# Altium PCB BaseNode.PcbDoc
Units mil, origin at the board's own origin, x right, y up, seen from the top; angles counter-clockwise.
Board outline 2200 x 2900 mil, 2 copper layers (Top Layer, Bottom Layer), stack 65.8 mil thick; 88 components, 76 nets, 334 pads, 80 vias.
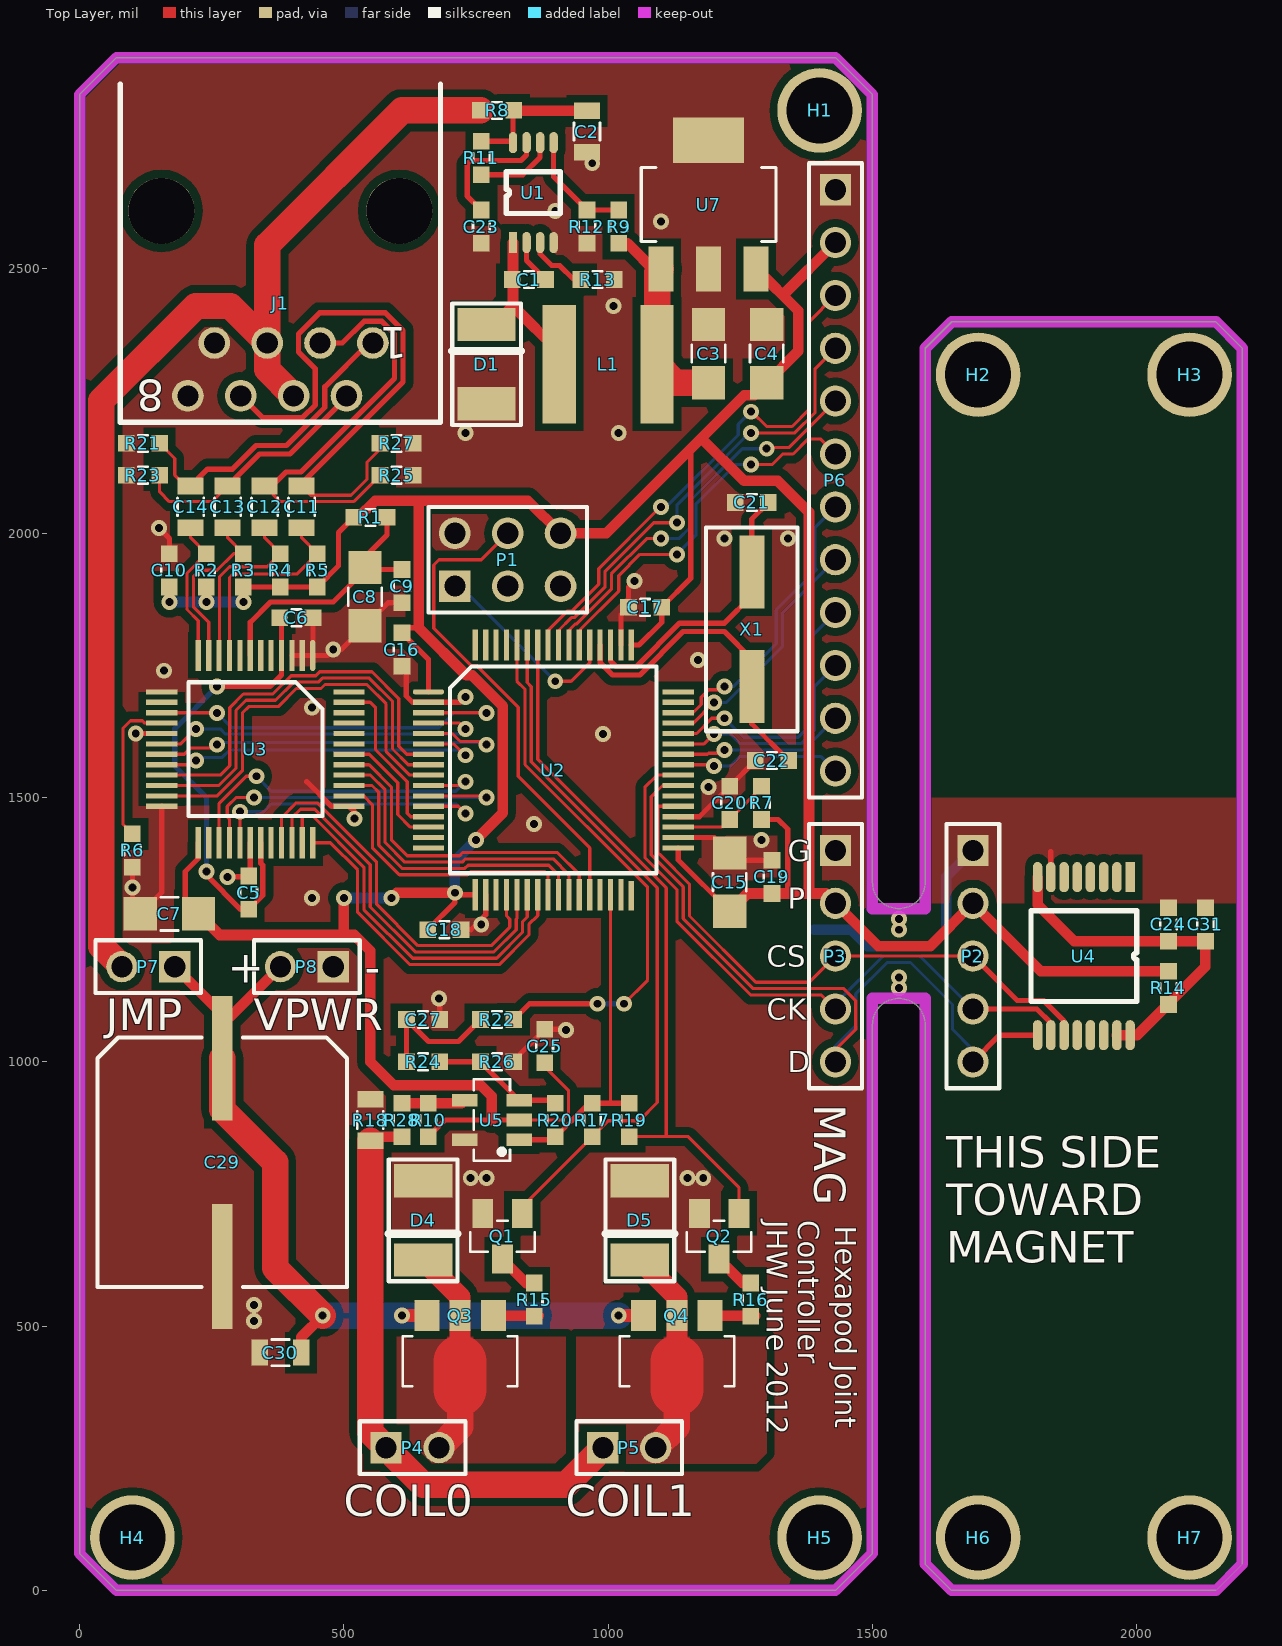
[diagram p0: Top Layer view]
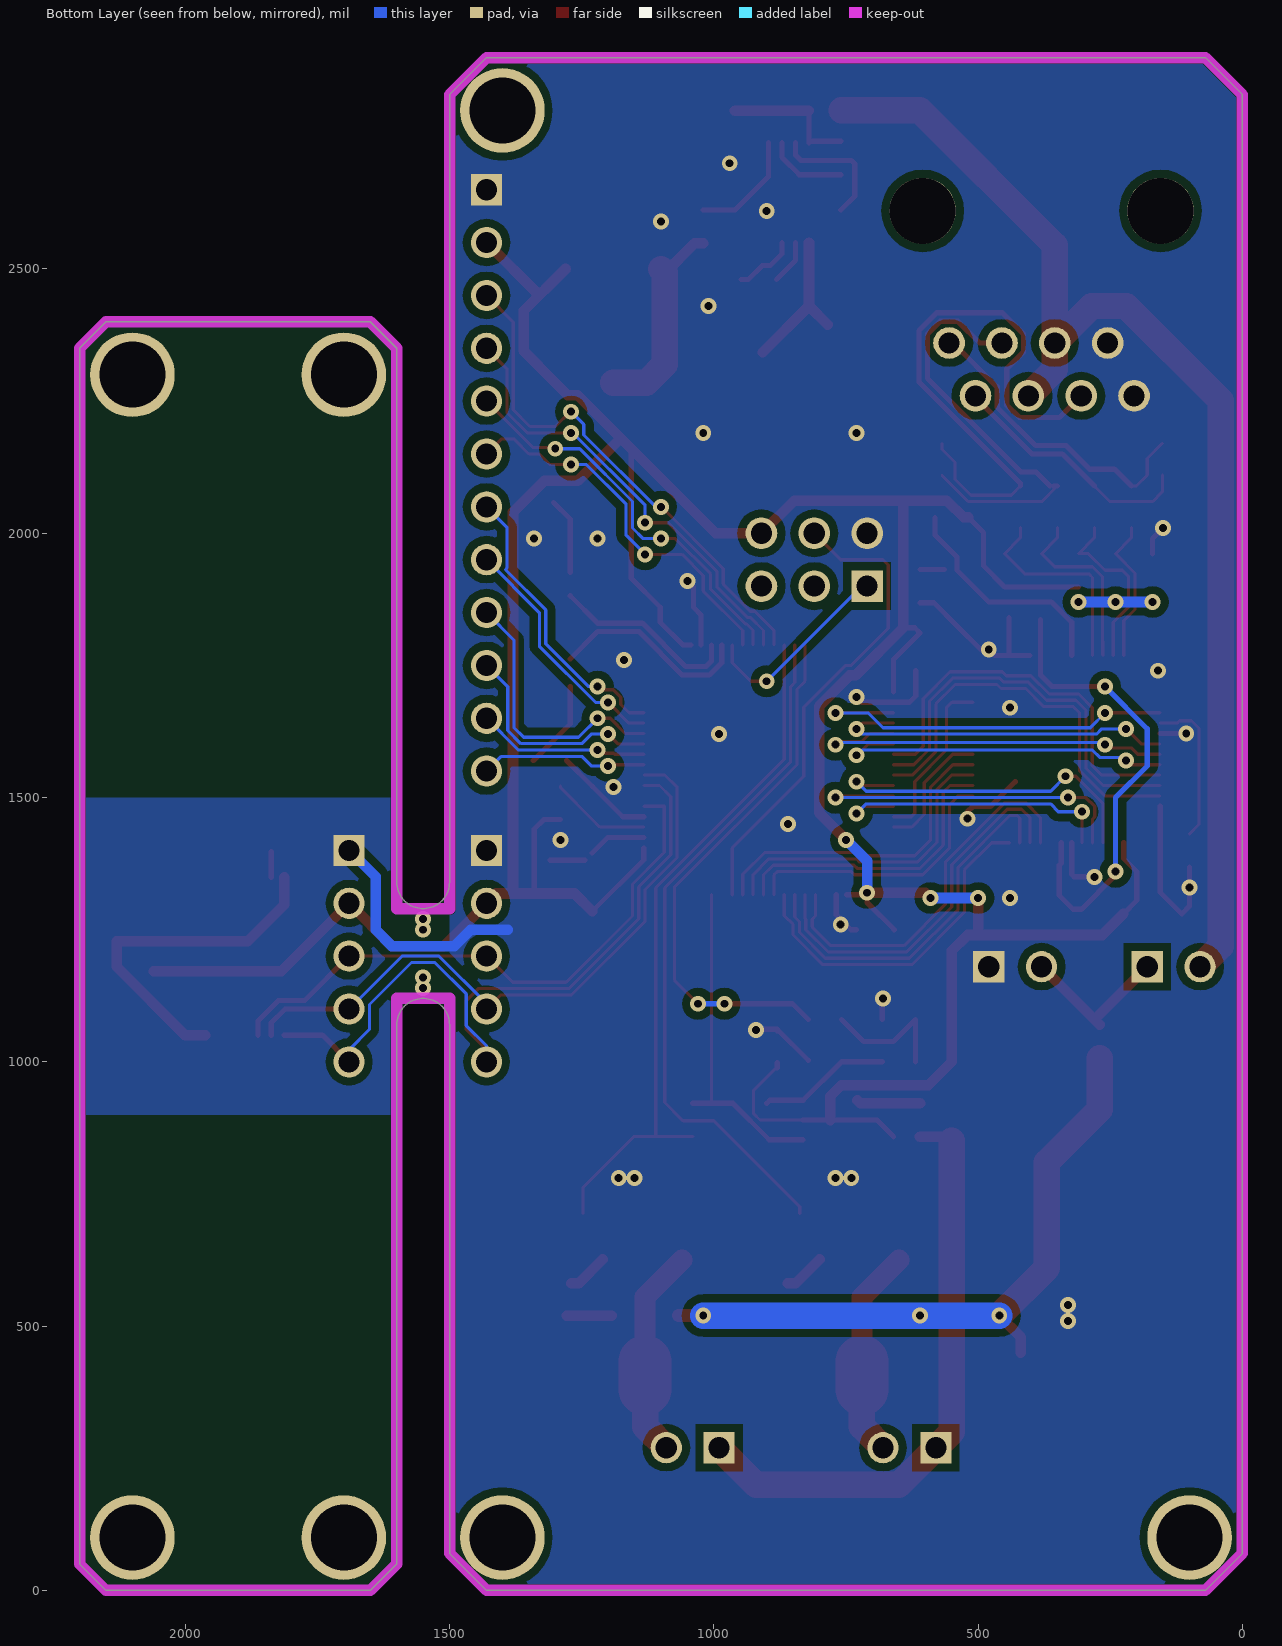
[diagram p1: Bottom Layer view, seen from below]

## Layer stack, top to bottom
Top Layer: signal copper 1.4
Dielectric: core 63, FR-4, Dk 4.8
Bottom Layer: signal copper 1.4

## Board outline
70,0 0,70 0,2830 70,2900 1430,2900 1500,2830 1500,1340 ccw(c1550,1340) 1600,1340 1600,2350 1650,2400 2150,2400 2200,2350 2200,50 2150,0 1650,0 1600,50 1600,1070 ccw(c1550,1070) 1500,1070 1500,70 1430,0

## Design rules (kind name [scope] priority, off if disabled: settings)
Clearance KEEPOUT [OnLayer('Keep-Out Layer')] p1: gap=1
Clearance POLY-STUFF [inpoly] p2: gap=15
Clearance [All] p3: gap=6
ComponentClearance [All] p1: gap=1 collisioncheckmode=3 verticalgap=1 showdistances=FALSE
HoleSize [All] p1: absolutevalues=TRUE maxlimit=500 minlimit=10 maxpercent=80.000 minpercent=20.000
MinimumSolderMaskSliver [All] p1: minsoldermaskwidth=3
PlaneConnect [All] p1: planeconnectstyle=Direct reliefexpansion=20 reliefentries=4 reliefconductorwidth=20 reliefairgap=10
PolygonConnect [All] p1: connectstyle=Direct reliefconductorwidth=20 reliefentries=4 polygonreliefangle="90 Angle"
RoutingVias [All] p1: holewidth=13 width=27 viastyle="Through Hole" minholewidth=10 minwidth=10 maxholewidth=500 maxwidth=500
SilkscreenOverComponentPads [All] p1: minsilkscreentomaskgap=3
SolderMaskExpansion [All] p1: expansion=2
Width [All] p1: maxlimit=100 minlimit=6 preferedwidth=10
23 further rules are at their usual default settings.

## Components (designator, comment, footprint, x,y, rotation, side; value= is the part's Value field where it differs from the comment)
C1 "0.1uF 25V" 0603 850,2480 r180 top
C2 "1uF 100V" 0805 960,2760 r90 top
C3 "22uF 6.3V" 1206 1190,2340 r270 top
C4 "22uF 6.3V" 1206 1300,2340 r270 top
C5 "2.2uF 10V" 0603 320,1320 r270 top
C6 "2.2uF 10V" 0603 410,1840 r180 top
C7 "22uF 6.3V" 1206 170,1280 r0 top
C8 "22uF 6.3V" 1206 540,1880 r90 top
C9 "0.1uF 25V" 0603 610,1900 r90 top
C10 "0.1uF 25V" 0603 170,1930 r270 top
C11 "33nF 250V" 0805 420,2050 r270 top
C12 "33nF 250V" 0805 350,2050 r270 top
C13 "33nF 250V" 0805 280,2050 r270 top
C14 "33nF 250V" 0805 210,2050 r270 top
C15 "22uF 6.3V" 1206 1230,1340 r270 top
C16 "0.1uF 25V" 0603 610,1780 r90 top
C17 "0.1uF 25V" 0603 1070,1860 r0 top
C18 "0.1uF 25V" 0603 690,1250 r180 top
C19 "0.1uF 25V" 0603 1310,1350 r270 top
C20 "2.2uF 10V" 0603 1230,1490 r270 top
C21 "20pF" 0603 1271.73,2058.27 r0 top
C22 "20pF" 0603 1310,1570 r0 top
C23 "0.1uF 25V" 0603 760,2580 r90 top
C24 "2.2uF 10V" 0603 2060,1260 r270 top
C25 "0.1uF 25V" 0603 880,1030 r270 top
C27 "2.2uF 10V" 0603 650,1080 r180 top
C29 "100uF 80V" "Capacitor 12mm DIA POLAR" 270,810 r90 top
C30 "1uF 100V" 0805 380,450 r0 top
C31 "2.2uF 10V" 0603 2130,1260 r270 top
D1 "CDBA140-G" SMA-DIODE 770,2320 r90 top
D4 "CDBA140-G" SMA-DIODE 650,700 r270 top
D5 "CDBA140-G" SMA-DIODE 1060,700 r270 top
H1 "MOUNT HOLE" MOUNT_HOLE 1400,2800 r0 top
H2 "MOUNT HOLE" MOUNT_HOLE 1700,2300 r0 top
H3 "MOUNT HOLE" MOUNT_HOLE 2100,2300 r0 top
H4 "MOUNT HOLE" MOUNT_HOLE 100,100 r0 top
H5 "MOUNT HOLE" MOUNT_HOLE 1400,100 r0 top
H6 "MOUNT HOLE" MOUNT_HOLE 1700,100 r0 top
H7 "MOUNT HOLE" MOUNT_HOLE 2100,100 r0 top
J1 "SS-6488-NF" SS-6488-NF 380,2610 r180 top
L1 "Inductor" "NR6028 Inductor" 1000,2320 r0 top
P1 "Header 3X2" HDR2X3 710,1900 r0 top
P2 "Header 5" HDR1X5 1690,1400 r270 top
P3 "Header 5" HDR1X5 1430,1400 r270 top
P4 "Header 2" HDR1X2 580,270 r0 top
P5 "Header 2" HDR1X2 990,270 r0 top
P6 "Header 12" HDR1X12 1430,2650 r270 top
P7 "Header 2" HDR1X2 180,1180 r180 top
P8 "Header 2" HDR1X2 480,1180 r180 top
Q1 "NFET" SOT-23 800,670 r180 top
Q2 "NFET" SOT-23 1210,670 r180 top
Q3 "#NAME?" "SOT-89 - PBSS305PX" 720,520 r180 top
Q4 "#NAME?" "SOT-89 - PBSS305PX" 1130,520 r180 top
R1 "LM4041EIM3X-1.2_1" 0603 550,2030 r0 top
R2 "51" 0603 240,1930 r270 top
R3 "51" 0603 310,1930 r270 top
R4 "51" 0603 380,1930 r270 top
R5 "51" 0603 450,1930 r270 top
R6 "6.49K" 0603 100,1400 r90 top
R7 "LM4041EIM3X-1.2_1" 0603 1290,1490 r90 top
R8 "LM4041EIM3X-1.2_1" 0603 790,2800 r0 top
R9 "3.16k" 0603 1020,2580 r270 top
R10 "1meg" 0603 660,890 r270 top
R11 "100k" 0603 760,2710 r90 top
R12 "6.49K" 0603 960,2580 r90 top
R13 "DNP" 0603 980,2480 r180 top
R14 "LM4041EIM3X-1.2_1" 0603 2060,1140 r270 top
R15 "1k" 0603 860,550 r270 top
R16 "1k" 0603 1270,550 r270 top
R17 "10k" 0603 970,890 r90 top
R18 "220m" 0805 550,890 r270 top
R19 "10k" 0603 1040,890 r90 top
R20 "1meg" 0603 900,890 r90 top
R21 "100k" 0603 120,2170 r0 top
R22 "1k" 0603 790,1080 r0 top
R23 "100k" 0603 120,2110 r0 top
R24 "100k" 0603 650,1000 r180 top
R25 "100k" 0603 600,2110 r180 top
R26 "10k" 0603 790,1000 r180 top
R27 "100k" 0603 600,2170 r180 top
R28 "3.16k" 0603 610,890 r270 top
U1 "LM5007MM/NOPB" MSOP-8 820,2550 r90 top
U2 "MCF51CN128CLH" "LQFP-64 10x10mm .5mm pitch" 660,1700 r0 top locked
U3 "KSZ8051MLL" "LQFP-48 7x7mm 0.5mm pitch" 441.1,1768.9 r270 top
U4 "AS5045-ASSU" SSOP-16 1900,1200 r270 top
U5 "MIC7221YM5 TR" SOT-23-5 780,890 r180 top
U7 "TC1262-3.3VDBTR" SOT-223 1100,2500 r0 top
X1 "ECS-250-20-3X-EN-TR" CSM-3X 1271.73,1818.27 r90 top

## Footprints (in the part's own frame and the unit in brackets; to place one, negate y for a bottom-side part, rotate by r counter-clockwise, add the part's x,y. Pads: shape width x height; smd on the part's side, far side on the other; paste and mask are expansions set on the pad)
0603 [mm]
  rect 0.8x0.8 smd: 1(-0.8,0) 2(0.8,0)
  silkscreen extent -0.23,-0.4 0.23,0.4, body extent -0.8,-0.4 0.8,0.4, height 0.45
0805 [mm]
  rect 0.8x1.25 smd: 1(-1,0) 2(1,0)
  silkscreen extent -0.43,-0.63 0.43,0.63, body extent -1,-0.63 1,0.63, height 1.25
1206 [mm]
  rect 1.6x1.6 smd: 1(-1.4,0) 2(1.4,0)
  silkscreen extent -0.43,-0.8 0.43,0.8, body extent -1.6,-0.8 1.6,0.8, height 1.6
"Capacitor 12mm DIA POLAR" [mm]
  rect 6x1 smd: 1(-5,0) 2(5,0)
  silkscreen extent -6,-6 6,6, body extent -6,-6 6,6, height 11
CSM-3X [mm]
  rect 3.5x1.2 smd: 1(-2.75,0) 2(2.75,0)
  silkscreen extent -4.9,-2.2 4.9,2.2
HDR1X2 [mm] "Connector; Header; 2 Position"
  rect 1.5x1.5 hole 1.016: 1(0,0)
  round 1.5 hole 1.016: 2(2.54,0)
  silkscreen extent -1.27,-1.27 3.81,1.27
HDR1X5 [mm] "Connector; Header; 5 Position"
  rect 1.5x1.5 hole 1.016: 1(0,0)
  round 1.5 hole 1.016: 2(2.54,0) 3(5.08,0) 4(7.62,0) 5(10.16,0)
  silkscreen extent -1.27,-1.27 11.43,1.27
HDR1X12 [mm] "Connector; Header; 12 Position"
  rect 1.5x1.5 hole 1.016: 1(0,0)
  round 1.5 hole 1.016: 2(2.54,0) 3(5.08,0) 4(7.62,0) 5(10.16,0) 6(12.7,0) 7(15.24,0) 8(17.78,0) 9(20.32,0) 10(22.86,0) 11(25.4,0) 12(27.94,0)
  silkscreen extent -1.27,-1.27 29.21,1.27
HDR2X3 [mil] "Connector; Header; 3x2 Position"
  rect 60x60 hole 40: 1(0,0)
  round 60 hole 40: 2(0,100) 3(100,0) 4(100,100) 5(200,0) 6(200,100)
  silkscreen extent -50,-50 250,150
"LQFP-48 7x7mm 0.5mm pitch" [mm]
  oval 1.5x0.25 smd: 1(0,0)
  rect 1.5x0.25 smd: 2(0,-0.5) 3(0,-1) 4(0,-1.5) 5(0,-2) 6(0,-2.5) 7(0,-3) 8(0,-3.5) 9(0,-4) 10(0,-4.5) 11(0,-5) 12(0,-5.5) 25(9,-5.5) 26(9,-5) 27(9,-4.5) 28(9,-4) 29(9,-3.5) 30(9,-3) 31(9,-2.5) 32(9,-2) 33(9,-1.5) 34(9,-1) 35(9,-0.5) 36(9,0)
  rect 0.25x1.5 smd: 13(1.75,-7.25) 14(2.25,-7.25) 15(2.75,-7.25) 16(3.25,-7.25) 17(3.75,-7.25) 18(4.25,-7.25) 19(4.75,-7.25) 20(5.25,-7.25) 21(5.75,-7.25) 22(6.25,-7.25) 23(6.75,-7.25) 24(7.25,-7.25) 37(7.25,1.75) 38(6.75,1.75) 39(6.25,1.75) 40(5.75,1.75) 41(5.25,1.75) 42(4.75,1.75) 43(4.25,1.75) 44(3.75,1.75) 45(3.25,1.75) 46(2.75,1.75) 47(2.25,1.75) 48(1.75,1.75)
  silkscreen extent 1.28,-5.96 7.71,0.47
"LQFP-64 10x10mm .5mm pitch" [mm]
  oval 1.5x0.25 smd: 1(0,0)
  rect 1.5x0.25 smd: 2(0,-0.5) 3(0,-1) 4(0,-1.5) 5(0,-2) 6(0,-2.5) 7(0,-3) 8(0,-3.5) 9(0,-4) 10(0,-4.5) 11(0,-5) 12(0,-5.5) 13(0,-6) 14(0,-6.5) 15(0,-7) 16(0,-7.5) 33(12,-7.5) 34(12,-7) 35(12,-6.5) 36(12,-6) 37(12,-5.5) 38(12,-5) 39(12,-4.5) 40(12,-4) 41(12,-3.5) 42(12,-3) 43(12,-2.5) 44(12,-2) 45(12,-1.5) 46(12,-1) 47(12,-0.5) 48(12,0)
  rect 0.25x1.5 smd: 17(2.25,-9.75) 18(2.75,-9.75) 19(3.25,-9.75) 20(3.75,-9.75) 21(4.25,-9.75) 22(4.75,-9.75) 23(5.25,-9.75) 24(5.75,-9.75) 25(6.25,-9.75) 26(6.75,-9.75) 27(7.25,-9.75) 28(7.75,-9.75) 29(8.25,-9.75) 30(8.75,-9.75) 31(9.25,-9.75) 49(9.75,2.25) 50(9.25,2.25) 51(8.75,2.25) 52(8.25,2.25) 53(7.75,2.25) 54(7.25,2.25) 55(6.75,2.25) 56(6.25,2.25) 57(5.75,2.25) 58(5.25,2.25) 59(4.75,2.25) 60(4.25,2.25) 61(3.75,2.25) 62(3.25,2.25) 63(2.75,2.25) 64(2.25,2.25)
  rect 0.25x1.4 smd: 32(9.75,-9.8)
  silkscreen extent 1.03,-8.71 10.96,1.22
MOUNT_HOLE [mil]
  round 160 hole 125: 0(0,0)
MSOP-8 [mil]
  rect 40x16 smd: 1(0,0)
  oval 40x16 smd: 2(0,-25.6) 3(0,-51.2) 4(0,-76.8) 5(189,-76.8) 6(189,-51.2) 7(189,-25.6) 8(189,0)
  silkscreen extent 55,-90 134,13
"NR6028 Inductor" [mm]
  rect 1.6x5.7 smd: 1(-2.35,0) 2(2.35,0)
SMA-DIODE [mm]
  rect 1.6x2.8 smd: A(-1.9,0) K(1.9,0)
  silkscreen extent -2.92,-1.65 2.92,1.65
SOT-23 [mm] "SOT-23"
  rect 1x1.4 smd: 1(-0.95,-1.1) 2(0.95,-1.1) 3(0,1.1)
  silkscreen extent -1.55,-0.75 1.55,0.75, body extent -1.55,-1.35 1.55,1.35, height 1.3
SOT-23-5 [mm] "SOT23, 5-Leads, Body 3.1x3.0mm (max), Pitch 0.95mm, IPC High Density"
  rect 1.22x0.62 smd: 1(-1.31,0.95) 2(-1.31,0) 3(-1.31,-0.95) 4(1.31,-0.95) 5(1.31,0.95)
  silkscreen extent -0.87,-1.95 0.87,1.95, body extent -1.4,-1.95 1.4,1.95, height 1
"SOT-89 - PBSS305PX" [mm] "SOT-89"
  rect 1.2x1.5 smd: 1(1.6,0) 3(-1.6,0)
  rect 1x1.5 smd: 2(0,0)
  Top Layer lines w1: 0,1.778 0,0
  Top Layer lines w2.54: 0,3.556 0,2.2
  silkscreen extent -2.75,1 2.75,3.4, body extent -2.75,0 2.75,4.4, height 1.3
SOT-223 [mil] "SOT-223"
  rect 135x86 smd: 0(90,244)
  rect 47x86 smd: 1(0,0) 2(90,0) 3(180,0)
  silkscreen extent -38,52 218,192, body extent -38,0 218,244, height 51
SS-6488-NF [mil] "RJ45"
  round 125 hole 125: 0(-225,0) 0(225,0)
  round 60 hole 40: 1(-175,250) 2(-125,350) 3(-75,250) 4(-25,350) 5(25,250) 6(75,350) 7(125,250) 8(175,350)
  silkscreen extent -303,-240 303,400, body extent -300,-407 300,407, height 505
SSOP-16 [mil]
  rect 57x18 smd: 1(-149.5,87.5)
  oval 57x18 smd: 2(-149.5,62.5) 3(-149.5,37.5) 4(-149.5,12.5) 5(-149.5,-12.5) 6(-149.5,-37.5) 7(-149.5,-62.5) 8(-149.5,-87.5) 9(149.5,-87.5) 10(149.5,-62.5) 11(149.5,-37.5) 12(149.5,-12.5) 13(149.5,12.5) 14(149.5,37.5) 15(149.5,62.5) 16(149.5,87.5)
  silkscreen extent -86,-100 86,100, body extent -104,-122 104,122, height 79

## Part data
C1 C2 C3 C4 C5 C6 C7 C8 C9 C10 C11 C12 C13 C14 C15 C16 C17 C18 C19 C20 C21 C22 C23 C24 C25 C27 C29 C30 C31: library part Capacitor, "Capacitor"
D1 D4 D5: "DIODE SCHOTTKY 40V 1A SMA"
J1: "CONN 8-8 MOD JACK"
P1: "Header, 3-Pin, Dual row"
P2 P3: "Header, 5-Pin"
P4 P5 P7 P8: "Header, 2-Pin"
P6: "Header, 12-Pin"
Q1 Q2: library part BSS123, "FET N-CH 100V 170MA SOT-23"
Q3 Q4: library part PBSS305PX,115, "TRANS PNP 80V 4A SOT89"
R1 R7 R8 R14: "Ferrite"
R2 R3 R4 R5 R6 R9 R10 R11 R12 R13 R15 R16 R17 R18 R19 R20 R21 R22 R23 R24 R25 R26 R27 R28: library part Resistor, "Resistor"
U1: "BUCK ADJ .5A 8MSOP"
U2: "MCU Coldfire w/ Ethernet"
U3: "Ethernet PHY MII"
U4: "IC ENCODER PROG 12-BIT 16-SSOP"
U5: "IC COMPARATOR R-R SOT-23-5"
U7: "Regulator IC CMOS LDO 3.3V 500MA SOT223-3"
X1: "CRYSTAL 25.00000 MHZ 20PF SMD"

## Via types
v1: diameter 30, hole 15, Top Layer to Bottom Layer, 80 vias

## Nets (pads, with @x,y where several pads share a name; then routed paths per layer and width w, separated by ;. In a path a pad name is that pad's centre, name@x,y a point inside that pad or via, vN(x,y) a via of type N, cw(c..) or ccw(c..) an arc to the next point about the centre after c; other vN are vias at no path point)
+1.2V: C5.2 C6.2 U3.4 U3.31 | length 896
  Top Layer w10: v1(240,1360) 240,1353.23 304.73,1288.5 C5.2 346.75,1315.25 346.75,1371.8 342.68,1375.87 U3.31 ; v1(260,1710) 360,1710 382.05,1732.05 U3.4 C6.2@382.05,1836.46
  Bottom Layer w10: v1(240,1360) 240,1500 180,1560 180,1630 v1(260,1710)
+3.3V: C4.2 C7.2 C10.2 C15.2 C16.2 C17.2 C18.2 C19.2 C25.2 P1.6 P2.2 P3.2 P6.2 R1.1 R2.2 R3.2 R4.2 R5.2 R7.1 R10.2 R14.1 U2.1 U2.17 U2.33 U2.49 U3.25 U5.2 U7.3 | length 7368.7
  Top Layer w6: U5.2 912.73,890 924.75,902.02 924.75,946.24 C25.2@880,990.99
  Top Layer w10: U3.25 224.57,1384.57 200,1360 200,1305.12 C7.2 ; R3.2 R4.2 R5.2 490,1938.5 490,2001.5 R1.1 ; 641.75,1821.37 619.87,1821.37 C16.2 660,1761.5 U2.1 ; C18.2 710,1301.5 v1@710,1316.14 ; R10.2 691.5,890 780,890 U5.2 ; v1(710,1320) v1@710,1316.14 ; U2.17 v1@710,1316.14 ; C25.2@880,988.55 880,990.99 C25.2 ; U2.49 1058.58,1788.58 1101.5,1831.5 C17.2 1156.16,1914.66 1156.16,2160 ; U2.33 1132.44,1382.44 C15.2 ; R7.1 1321.5,1458.5 1340,1440 1340,1318.5
  Top Layer w20: C7.2 265.12,1240 500,1240 ; v1(500,1310) 500,1240 ; R1.1 527.37,2030 559.12,2061.75 640,2061.75 ; v1(590,1310) 600,1320 v1(710,1320) ; v1(750,1420) 801,1471 801,1672.84 742.79,1731.06 732.06,1731.06 641.75,1821.37 641.75,2060 640,2061.75 ; 780,890 780,934.67 759.07,955.61 594.39,955.61 550,1000 550,1210 520,1240 500,1240 ; 1176.16,2180 1257.16,2099 1321,2099 1380,2040 1380,1318.5 ; C15.2 1263.62,1318.5 C19.2 1340,1318.5 1380,1318.5 ; U7.3 1280.74,2500 1360,2420.74 1360,2344.88 C4.2 1276.12,2261 1257.16,2261 1156.16,2160 996.16,2000 P1.6 848.25,2061.75 640,2061.75 ; 1330.74,2450.74 P6.2 ; R14.1 1818.5,1171.5 P2.2 1609,1219 1511,1219 P3.2 1411.5,1318.5 1380,1318.5
  Bottom Layer w20: v1(170,1870) v1(240,1870) v1(310,1870) ; v1(500,1310) v1(590,1310) ; v1(710,1320) 710,1380 v1(750,1420)
+3.7V: C3.2 L1.2 R9.2 U7.1 | length 390.8
  Top Layer w20: R9.2 1036.54,2548.5 U7.1@1092.52,2492.52
  Top Layer w50: U7.1 1092.52,2492.52 L1.2 1127.64,2284.88 C3.2
AUTONEG_EN: U2.14 U3.42 | length 242.2
  Top Layer w6: U3.42 548.11,1581.89 602,1528 602,1468 625.91,1444.09 U2.14
AUX_ADC_0: P6.12 U2.41 | length 314.4
  Top Layer w6: U2.41 v1@1197.8,1562.2
  Bottom Layer w6: v1(1200,1560) 1232,1560 1250,1578 1402,1578 P6.12
AUX_ADC_1: P6.11 U2.42 | length 325.8
  Top Layer w6: U2.42 1187.95,1581.89 1190.06,1584 1214,1584 v1(1220,1590)
  Bottom Layer w6: v1(1220,1590) 1370,1590 P6.11
AUX_ADC_2: P6.10 U2.43 | length 422.6
  Top Layer w6: U2.43 1181.58,1601.57 v1(1200,1620)
  Bottom Layer w6: v1(1200,1620) 1232,1620 1250,1602 1365.03,1602 1390,1626.97 1390,1710 P6.10
AUX_ADC_3: P6.9 U2.44 | length 519.4
  Top Layer w6: U2.44 1167.32,1621.26 1196.06,1650 v1(1220,1650)
  Bottom Layer w6: v1(1220,1650) 1256,1614 1360,1614 1378,1632 1378,1798 P6.9
BKGD: P1.1 U2.53 | length 367.7
  Top Layer w6: v1(900,1720) 930,1720 965.12,1755.12 U2.53
  Bottom Layer w6: P1.1@720,1900 v1(900,1720)
COIL0+: D4.K P4.2 Q3.2 | length 260.8
  Top Layer w39.37: D4.K 720,555.2 Q3.2
  Top Layer w50: P4.2 720,310 720,380
COIL0_I\N\H\: Q1.1 R17.1 U2.59 | length 1317.3
  Top Layer w6: Q1.1 837.4,725.91 R17.1 1000,888.5 1058.5,888.5 1093.03,923.03 1093.03,1329.08 854.69,1567.41 854.69,1710 847.01,1717.68 U2.59
COIL1+: D5.K P5.2 Q4.2 | length 260.8
  Top Layer w39.37: D5.K 1130,555.2 Q4.2
  Top Layer w50: P5.2 1130,310 1130,380
COIL1_I\N\H\: Q2.1 R19.1 U2.58 | length 1327.3
  Top Layer w6: U2.58 866.69,1572.38 1110,1329.08 1110,858.5 ; R19.1 1151.5,858.5 1247.4,762.6 Q2.1
COIL-: P4.1 P5.1 R18.2 R28.2 | length 1124.3
  Top Layer w20: R18.2 557.87,858.5 R28.2
  Top Layer w50: R18.2 550,300 P4.1 650,200 920,200 P5.1
COIL_CTL: R22.2 U2.60 | length 1020.4
  Top Layer w6: U2.60 827.32,1720.4 842.69,1705.03 842.69,1562.44 1074.62,1330.52 1074.62,1154.62 v1(1030,1110)
  Top Layer w10: R22.2 851.5,1110 v1(980,1110)
  Bottom Layer w10: v1(980,1110) v1(1030,1110)
COIL_FB: R17.2 R19.2 R20.1 U2.30 U5.1 | length 631.1
  Top Layer w6: 1004.49,922.01 U2.30
  Top Layer w10: U5.1 895.13,852.6 964.02,921.5 R17.2 R19.2
COL: U2.26 U3.40 | length 595.4
  Top Layer w6: U3.40 550.51,1542.52 578,1515.03 578,1415.03 615.03,1378 724.06,1378 730.06,1384 896,1384 925.75,1354.25 U2.26
CRS: U2.27 U3.41 | length 623.4
  Top Layer w6: U3.41 547.8,1562.2 590,1520 590,1420 620,1390 719.09,1390 725.09,1396 904,1396 945.43,1354.57 U2.27
EXTAL: C21.2 U2.51 X1.2 | length 501.9
  Top Layer w10: U2.51 1004.49,1758.26 1014.7,1748.06 1053.34,1748.06 1135.28,1830 1220,1830 X1.2@1271.73,1881.73 ; X1.2 1271.73,2026.77 C21.2
GND: C2.1 C3.1 C4.1 C5.1 C6.1 C7.1 C8.1 C9.1 C10.1 C15.1 C16.1 C17.1 C18.1 C19.1 C20.1 C21.1 C22.1 C23.1 C24.1 C25.1 C27.1 C29.1 C30.1 C31.1 D1.A D4.A D5.A J1.7 J1.8 P1.2 P2.1 P3.1 P6.1 P8.1 Q1.2 Q2.2 R6.1 R12.1 R13.1 R18.1 R21.1 R23.1 R25.1 R26.1 R27.1 U1.4 U2.2 U2.18 U2.34 U2.36 U2.50 U3.1 U3.2 U3.3 U3.13 U3.17 U3.24 U3.30 U3.37 U4.7 U5.5 U7.0 U7.2 | length 2380.9
  Top Layer w10: R6.1 v1(100,1330) 100,1294.88 C7.1 155.67,1320.79 U3.24 ; v1@111.26,1621.26 U3.17 ; v1(150,2010) 170,1990 C10.1 ; v1(280,1350) 318.5,1350 C5.1 322.99,1354.49 U3.30 ; U3.3 U3.2 U3.1 468.9,1768.9 v1(480,1780) 495.12,1780 C8.1 583.62,1868.5 C9.1 ; 430,1530 476.54,1483.46 U3.37 520,1473.46 v1(520,1460) ; U3.1@441.5,1769.29 C6.1 ; C16.1@618,1740.5 618,1692 629.68,1680.32 U2.2 720.32,1680.32 v1(730,1690) ; C27.1 v1@681.5,1118.5 ; C18.1@730,1250 740,1250 768.27,1278.27 U2.18 ; R26.1@821.5,1002.99 C25.1 ; C25.1@880,1058.5 C25.1 ; v1@918.5,1061.5 C25.1 ; U2.50 1024.17,1845.67 C17.1 1038.5,1898.5 v1(1050,1910) ; U2.34 1200.71,1424.41 C15.1 ; U2.36 1172.28,1463.78 C20.1 C22.1 ; C15.1@1243.62,1381.5 C19.1 ; U4.7 1837.5,1397.5
  Bottom Layer w20: 1390,1250 1460,1250 1491,1219 1609,1219 1640,1250 1640,1350 P2.1
  other v1: 330,510 330,540 740,780 770,780 1150,780 1180,780 920,1060 680,1120 760,1260 440,1310 1290,1420 860,1450 1190,1520 990,1620 106.26,1621.26 440,1670 160,1740 1170,1760 1220,1990 1340,1990 730,2190 1020,2190 1010,2430 1100,2590 900,2610 970,2700
I2C_SCL: P6.8 U2.45 | length 463
  Top Layer w6: U2.45 1160.95,1640.95 v1(1200,1680)
  Bottom Layer w6: v1(1200,1680) 1223.94,1680 1330,1786.06 1330,1850 P6.8
I2C_SDA: P6.7 U2.46 | length 555.4
  Top Layer w6: U2.46 1160.63,1660.63 1176,1676 1176,1689.94 1190.06,1704 1214,1704 v1(1220,1710)
  Bottom Layer w6: v1(1220,1710) 1236.97,1710 1318,1791.03 1318,1854.97 1394.27,1931.24 1391.47,1934.04 1391.47,2011.47 P6.7
MAG_PWR: C24.2 C31.2 R14.2 U4.8 U4.15 U4.16 | length 667.7
  Top Layer w20: U4.8 1812.5,1297.5 1881.5,1228.5 C24.2 C31.2 2130,1180 2000.5,1050.5 U4.16 U4.15
MCU_VDDA: C20.2 R7.2 U2.35 | length 191.4
  Top Layer w6: U2.35 1215.59,1444.09 C20.2 1290,1518.5 R7.2
MII_MDC: U2.5 U3.19 | length 735.5
  Top Layer w6: U3.19 197.95,1581.89 210.06,1594 254,1594 v1(260,1600) ; U2.5 704.8,1621.26 720.06,1606 v1@764,1606
  Bottom Layer w6: v1(260,1600) 264,1604 766,1604 v1(770,1600)
MII_MDIO: U2.4 U3.18 | length 668.9
  Top Layer w6: U3.18 191.58,1601.57 v1(220,1630) ; U2.4 719.05,1640.95 v1(730,1630)
  Bottom Layer w6: v1(220,1630) 266,1630 276,1620 720,1620 v1(730,1630)
NetC1_1: C1.1 U1.2 | length 84.9
  Top Layer w10: U1.2 845.6,2515.9 C1.1
NetC1_2: C1.2 D1.K L1.1 U1.1 | length 293.5
  Top Layer w20: D1.K@784.8,2394.8 820,2430 ; U1.1 820,2430 ; L1.1@907.48,2342.52 820,2430
NetC2_2: C2.2 R8.2 R11.2 U1.8 | length 256.1
  Top Layer w10: R11.2 U1.8@817.5,2741.5 ; U1.8 R8.2@820,2798.5
  Top Layer w20: R8.2@820.87,2799.37 C2.2
NetC11_2: C11.2 R5.1 U3.9 | length 394.1
  Top Layer w6: U3.9 283.62,1916.35 290.52,1923.25 411.76,1923.25 R5.1 420,1991.5 C11.2
NetC12_2: C12.2 R4.1 U3.10 | length 371.6
  Top Layer w6: U3.10@263.94,1796.39 U3.10 264.75,1769.71 264.75,1917.78 283.72,1936.75 355.25,1936.75 R4.1 350,1991.5 C12.2
NetC13_2: C13.2 R3.1 U3.11 | length 335.4
  Top Layer w6: U3.11 244.25,1831.81 215.25,1860.81 215.25,1917.98 227.27,1930 260,1930 291.5,1961.5 R3.1 280,1991.5 C13.2
NetC14_2: C14.2 R2.1 U3.12 | length 278.2
  Top Layer w6: C14.2 210,1991.5 R2.1 203.25,1924.75 203.25,1855.84 224.57,1834.52 U3.12
NetC23_2: C23.2 U1.7 | length 241.1
  Top Layer w10: C23.2 733.25,2638.24 733.25,2698.81 739.7,2705.25 835.25,2705.25 845.6,2715.6 U1.7
NetC27_2: C27.2 R22.1 R24.2 | length 254.4
  Top Layer w10: R24.2 C27.2 660,1038.5 717.01,1038.5 R22.1
NetQ1_3: Q1.3 R15.1 | length 78.7
  Top Layer w20: Q1.3 845.2,581.5 R15.1
NetQ2_3: Q2.3 R16.1 | length 78.7
  Top Layer w20: Q2.3 1255.2,581.5 R16.1
NetQ3_3: Q3.3 R15.2 | length 85.5
  Top Layer w20: Q3.3 R15.2@868.5,520
NetQ4_3: Q4.3 R16.2 | length 85.5
  Top Layer w20: Q4.3 R16.2@1278.5,520
NetR6_2: R6.2 U3.16 | length 288.1
  Top Layer w6: R6.2 82.26,1449.24 82.26,1631.2 96.32,1645.26 119.08,1645.26 123.39,1640.95 U3.16
NetR9_1: R9.1 R12.2 U1.5 | length 213.7
  Top Layer w10: U1.5 896.8,2674.7 R12.2 R9.1
NetR10_1: R10.1 R28.1 U5.4 | length 120.9
  Top Layer w20: R28.1 R10.1 722.52,921.5 U5.4
NetR11_1: R11.1 U1.6 | length 152.5
  Top Layer w10: R11.1 838.5,2678.5 871.2,2711.2 U1.6
NetR13_2: R13.2 U1.3 | length 118.7
  Top Layer w10: U1.3 871.2,2528.8 893.25,2506.75 908.24,2506.75 934.99,2480 R13.2
NetR20_2: R20.2 R24.1 R26.2 U5.3 | length 251
  Top Layer w10: R24.1 R26.2 831.1,927.4 U5.3 894.09,927.4 R20.2
PHY_R\S\T\: U2.13 U3.47 | length 321.7
  Top Layer w6: U3.47 549.68,1680.32 560,1670 560,1590 620,1530 620,1470 626.22,1463.78 U2.13
PHYCLK: U2.3 U3.15 | length 746.3
  Top Layer w6: U3.15 v1@259.37,1660.63 ; U2.3 v1@769.37,1660.63
  Bottom Layer w6: v1(260,1660) 288,1632 680,1632 708,1660 v1(770,1660)
R\E\S\E\T\: P1.4 U2.28 | length 917.2
  Top Layer w6: P1.4 760,1950 680,1950 670,1940 670,1819.99 739.93,1750.06 750.66,1750.06 830,1670.71 830,1540 965.12,1404.88 U2.28
RXC: U2.11 U3.28 | length 680.9
  Top Layer w6: U3.28 283.62,1459.05 279.31,1463.37 279.31,1483.25 296.06,1500 v1(330,1500) v1@325.81,1495.81 ; U2.11 v1@766.85,1503.15
  Bottom Layer w6: v1(330,1500) v1(770,1500)
RXD0: U2.9 U3.23 | length 779.7
  Top Layer w6: U3.23 260.7,1503.15 308,1550.45 308,1660.06 319.94,1672 375.74,1672 410.11,1706.37 456.81,1706.37 464.36,1713.92 543.26,1713.92 580,1677.18 580,1586.97 624.45,1542.52 U2.9
RXD1: U2.8 U3.22 | length 773.3
  Top Layer w6: U3.22 263.42,1522.83 296,1555.42 296,1665.03 314.97,1684 370.77,1684 405.14,1718.37 451.84,1718.37 459.39,1725.92 548.23,1725.92 592,1682.15 592,1591.94 621.74,1562.2 U2.8
RXD2: U2.7 U3.21 | length 766.9
  Top Layer w6: U3.21 266.13,1542.52 284,1560.39 284,1670 310,1696 365.8,1696 400.17,1730.37 446.87,1730.37 454.42,1737.92 553.2,1737.92 604,1687.12 604,1596.91 619.02,1581.89 U2.7
RXD3: U2.6 U3.20 | length 668.9
  Top Layer w6: U3.20 212.21,1562.2 v1(220,1570) ; U2.6 707.51,1601.57 729.09,1580 v1(730,1580)
  Bottom Layer w6: v1(220,1570) 226,1576 269.94,1576 283.94,1590 720,1590 v1(730,1580)
RXDV: U2.10 U3.27 | length 643.7
  Top Layer w6: U3.27 263.94,1488.94 315.31,1540.31 v1(334.69,1540.31) ; U2.10 v1@722.84,1522.83
  Bottom Layer w6: v1(334.69,1540.31) 363,1512 712,1512 v1(730,1530)
RXER: U2.12 U3.29 | length 574.6
  Top Layer w6: U3.29 v1(303.31,1473.31) ; U2.12 716.54,1483.46 v1(730,1470)
  Bottom Layer w6: v1(303.31,1473.31) 348.31,1473.31 363,1488 712,1488 v1(730,1470)
RXM: C11.1 J1.6 R27.2 | length 1138.8
  Top Layer w6: C11.1 437.37,2072 513.53,2072 543.76,2102.22 543.76,2134.75 568.5,2159.5 R27.2
  Top Layer w10: J1.6 346,2219 421.98,2219 446,2243.02 446,2311.02 414,2343.02 414,2376.98 454.02,2417 578.61,2417 612,2383.61 612,2286.39 420,2094.39 C11.1
RXP: C12.1 J1.3 R25.2 | length 826.5
  Top Layer w6: C12.1 379.37,2060 518.5,2060 R25.2
  Top Layer w10: C12.1 C12.1@357,2089.37 ; C12.1@364.09,2089.37 390.84,2116.12 419.1,2116.12 596,2293.02 596,2376.98 571.98,2401 538.02,2401 497.02,2360 J1.3
SPI_C\S\: P2.3 P3.3 U2.37 U4.11 | length 1146.2
  Top Layer w6: U2.37 1093.47,1483.46 1093.91,1483.02 1093.91,1396.08 1099.18,1390.8 1154,1336 1154,1276 1279.47,1150.53 1380.53,1150.53 P3.3 ; P3.3@1430,1184 P3.3 ; P2.3 P3.3
  Top Layer w10: P2.3 1774,1116 1824,1116 1862.5,1077.5 U4.11
SPI_C\S\2\_AUX: P6.3 U2.57 | length 983.3
  Top Layer w6: U2.57 886.38,1816.38 922.49,1852.49 930.93,1852.49 982.19,1903.75 982.19,1933.11 1099.09,2050 v1(1100,2050) ; v1(1270,2230) 1272,2230 1300,2202 1348.06,2202 1379.47,2233.41 1379.47,2399.47 P6.3
  Bottom Layer w6: v1(1100,2050) 1110,2050 1246,2186 1246,2206 v1(1270,2230)
SPI_MISO: P2.5 P3.5 U2.39 U4.9 | length 1490.9
  Top Layer w6: U2.39 1102.84,1522.83 1081.47,1501.46 1081.47,1391.55 1142,1331.02 1142,1271.03 1274.5,1138.53 1445.96,1138.53 1468.53,1115.96 1468.53,1061.47 1430,1022.94 P3.5
  Top Layer w10: P2.5 1740.5,1050.5 U4.9
  Bottom Layer w6: P3.5 1430,1030 1468.53,1068.53 1468.53,1128.53 1528,1188 1572,1188 1651.47,1108.53 1651.47,1061.47 1690,1022.94 P2.5
SPI_MISO_AUX: P6.5 U2.55 | length 760
  Top Layer w6: U2.55 925.75,1816.07 938.16,1828.49 940.87,1828.49 1006.19,1893.81 1006.19,1923.16 1073.03,1990 v1(1100,1990) ; v1(1300,2160) v1@1302,2162 ; v1@1300,2162 v1@1302,2162 ; P6.5 1342,2162 v1@1302,2162
  Bottom Layer w6: v1(1100,1990) 1133.94,1990 1154,2010.06 1154,2060.06 1253.94,2160 v1(1300,2160)
SPI_MOSI_AUX: P6.4 U2.56 | length 866.9
  Top Layer w6: U2.56 906.06,1816.07 930.47,1840.49 935.9,1840.49 994.19,1898.78 994.19,1928.13 1086.06,2020 v1(1130,2020) ; v1@1260,2190 v1(1270,2190) 1353.03,2190 1391.47,2228.44 1391.47,2311.47 P6.4
  Bottom Layer w6: v1(1130,2020) 1130,2053.03 v1@1268.49,2191.51
SPI_SCK: P2.4 P3.4 U2.40 U4.10 | length 1249.8
  Top Layer w6: U2.40 1092.52,1542.52 1069.47,1519.46 1069.47,1386.58 1130,1326.05 1130,1266.06 1269.53,1126.53 1403.47,1126.53 P3.4
  Top Layer w10: P2.4 1810.78,1100 1837.5,1073.28 U4.10
  Bottom Layer w6: P3.4 1430,1110 1520,1200 1590,1200 P2.4
SPI_SCK_AUX: P6.6 U2.54 | length 725.8
  Top Layer w6: U2.54 945.43,1816.07 1020,1890.64 1020,1920 1060,1960 v1(1130,1960) ; v1(1270,2130) 1310,2130 1330,2150 1350,2150 1378.49,2178.49 1401.51,2178.49 P6.6
  Bottom Layer w6: v1(1130,1960) 1166,1996 1166,2055.09 1240.91,2130 v1(1270,2130)
TXC: U2.20 U3.33 | length 728
  Top Layer w6: U3.33 382.05,1462.05 410,1490 450,1490 562,1378 562,1298 640,1220 779.09,1220 814,1254.91 814,1269.94 807.64,1276.3 U2.20
TXD0: U2.22 U3.35 | length 719.2
  Top Layer w6: U3.35 421.42,1461.42 426,1466 440.06,1466 538,1368.06 538,1288.06 630.06,1196 789.03,1196 838,1244.97 838,1264.97 847.01,1273.98 U2.22
TXD1: U2.23 U3.36 | length 657.5
  Top Layer w6: U3.36 474.52,1414.57 526,1363.09 526,1283.09 625.09,1184 794,1184 850,1240 850,1260 866.69,1276.69 U2.23
TXD2: U2.24 U3.38 | length 528.5
  Top Layer w6: U3.38 537.49,1503.15 554,1486.64 554,1405.09 605.09,1354 734,1354 740,1360 880,1360 886.38,1353.62 U2.24
TXD3: U2.25 U3.39 | length 567.4
  Top Layer w6: U3.39 553.22,1522.83 566,1510.06 566,1410.06 610.06,1366 729.03,1366 735.03,1372 888,1372 906.06,1353.94 U2.25
TXEN: U2.21 U3.34 | length 721
  Top Layer w6: U3.34 401.73,1461.73 418,1478 445.03,1478 550,1373.03 550,1293.03 635.03,1208 784.06,1208 826,1249.94 826,1269.94 827.32,1271.26 U2.21
TXM: C13.1 J1.2 R23.2 | length 474.2
  Top Layer w6: R23.2 151.5,2078.5 170,2060 250.63,2060 C13.1
  Top Layer w10: C13.1 340.63,2150 398.24,2150 J1.2@505,2256.76
TXP: C14.1 J1.1 R21.2 | length 590.1
  Top Layer w6: R21.2 180,2141.5 180,2110 200.63,2089.37 C14.1
  Top Layer w10: C14.1 241.94,2121.31 289.32,2121.31 334,2166 391.61,2166 464,2238.39 464,2276.98 547.02,2360 J1.1
VALVE_PWR: C29.2 C30.2 P7.1 P8.2 Q3.1 Q4.1 | length 1589.2
  Top Layer w20: P7.1 C29.2@270,1090 ; C29.2@270,1070 P8.2 ; C30.2 419.37,479.37 v1(460,520)
  Top Layer w25: v1(610,520) Q3.1 ; v1(1020,520) Q4.1
  Top Layer w50: C29.2 270,910 370,810 370,610 v1(460,520)
  Bottom Layer w50: v1(460,520) v1(610,520) v1(1020,520)
VDDA: C8.2 C9.2 R1.2 U3.7 | length 484
  Top Layer w10: U3.7 322.99,1831.54 361.45,1870 480,1870 540,1930 C8.2 540,1955.12 581.5,1996.61 R1.2 ; C8.2@563.62,1931.5 C9.2
VIN: J1.4 J1.5 P7.2 R8.1 | length 2319.1
  Top Layer w50: P7.2 41,1219 41,2251 220,2430 285,2430 J1.5 ; J1.4 355,2310 J1.5 ; R8.1 610,2800 355,2545 J1.5
XTAL: C22.2 U2.52 X1.1 | length 554.1
  Top Layer w10: U2.52 984.8,1755.32 1008.07,1732.06 1059.96,1732.06 1141.91,1814 1220,1814 X1.1@1271.73,1762.27 ; X1.1 1271.73,1639.76 C22.2
pads on no net: H1.0 H2.0 H3.0 H4.0 H5.0 H6.0 H7.0 J1.0 P1.3 P1.5 U2.15 U2.16 U2.19 U2.29 U2.31 U2.32 U2.38 U2.47 U2.48 U2.61 U2.62 U2.63 U2.64 U3.5 U3.6 U3.8 U3.14 U3.26 U3.32 U3.43 U3.44 U3.45 U3.46 U3.48 U4.1 U4.2 U4.3 U4.4 U4.5 U4.6 U4.12 U4.13 U4.14
copper on no net:
  other v1: 1550,1140 1550,1160 1550,1250 1550,1270

## Polygon pours and split planes (outlines as drawn)
GND on Bottom Layer "GND" (solid, remove dead copper, pour order 2): 70,0 0,70 0,2830 70,2900 1430,2900 1500,2830 1500,70 1430,0
GND on Bottom Layer "MAG_GND" (solid, pour order 11): 1600,1500 2200,1500 2200,900 1600,900
GND on Top Layer "TOP_GND" (solid, remove dead copper, pour order 9): 70,0 0,70 0,2830 70,2900 1430,2900 1500,2830 1500,70 1430,0
GND on Top Layer "MAG_GND" (solid, pour order 13): 1600,1500 2200,1500 2200,1300 1600,1300
COIL1+ on Top Layer "HEAT_SPREAD1" (solid, pour order 8): 940,480 940,300 1000,240 1020,240 1280,240 1300,260 1300,480
COIL0+ on Top Layer "HEAT_SPREAD0" (solid, pour order 6): 600,480 600,320 600,300 660,240 900,240 920,260 920,480

## Keep-outs
Keep-Out Layer:
  lines w22: 0,70 0,2830 70,2900 1430,2900 1500,2830 1500,1290 1600,1290 1600,2350 1650,2400 2150,2400 2200,2350 2200,50 2150,0 1650,0 1600,50 1600,1120 1500,1120 1500,70 1430,0 70,0 0,70

## Silkscreen, mask and mechanical layers (free items; w line width, h text height)
Top Overlay:
  text "G" at 1340,1380 h40
  text "P" at 1340,1290 h40
  text "CS" at 1300,1180 h40
  text "+" at 280,1150 h60
  text "-" at 540,1150 h60
  text "CK" at 1300,1080 h40
  text "JMP" at 50,1060 h60
  text "VPWR" at 330,1060 h60
  text "D" at 1340,980 h40
  text "MAG" at 1390,920 h60 r270
  text "THIS SIDE" at 1640,800 h60
  text "TOWARD" at 1640,710 h60
  text "JHW June 2012" at 1300,700 h40 r270
  text "Controller" at 1360,700 h40 r270
  text "Hexapod Joint" at 1430,690 h40 r270
  text "MAGNET" at 1640,620 h60
  text "COIL0" at 500,140 h60
  text "COIL1" at 920,140 h60
Assembly Top:
  lines w7.87: 30,1130 230,1130 230,1230 30,1230 30,1130 ; 330,1130 330,1230 530,1230 530,1130 330,1130 ; 530,220 530,320 730,320 730,220 530,220 ; 940,220 940,320 1140,320 1140,220 940,220 ; 1380,950 1380,1450 1480,1450 1480,950 1380,950 ; 1380,1500 1380,2700 1480,2700 1480,1500 1380,1500 ; 1640,950 1640,1450 1740,1450 1740,950 1640,950
  text "AUX" at 1420,2140 h30 r270
  text "MAG" at 1420,1240 h30 r270
  text "MAG" at 1680,1230 h30 r270
  text "JUMP" at 70,1160 h30
  text "VALVEPWR" at 320,1090 h30
Board Outline:
  the board outline again, w10

## Text inside footprints (layer, text, board x,y; h text height)
J1: Top Overlay "1" at 620,2390 h60 r180; Top Overlay "8" at 160,2290 h60 r180